# EAGLE board SC182029-V2R0-Encoder (EAGLE 9.4.0)
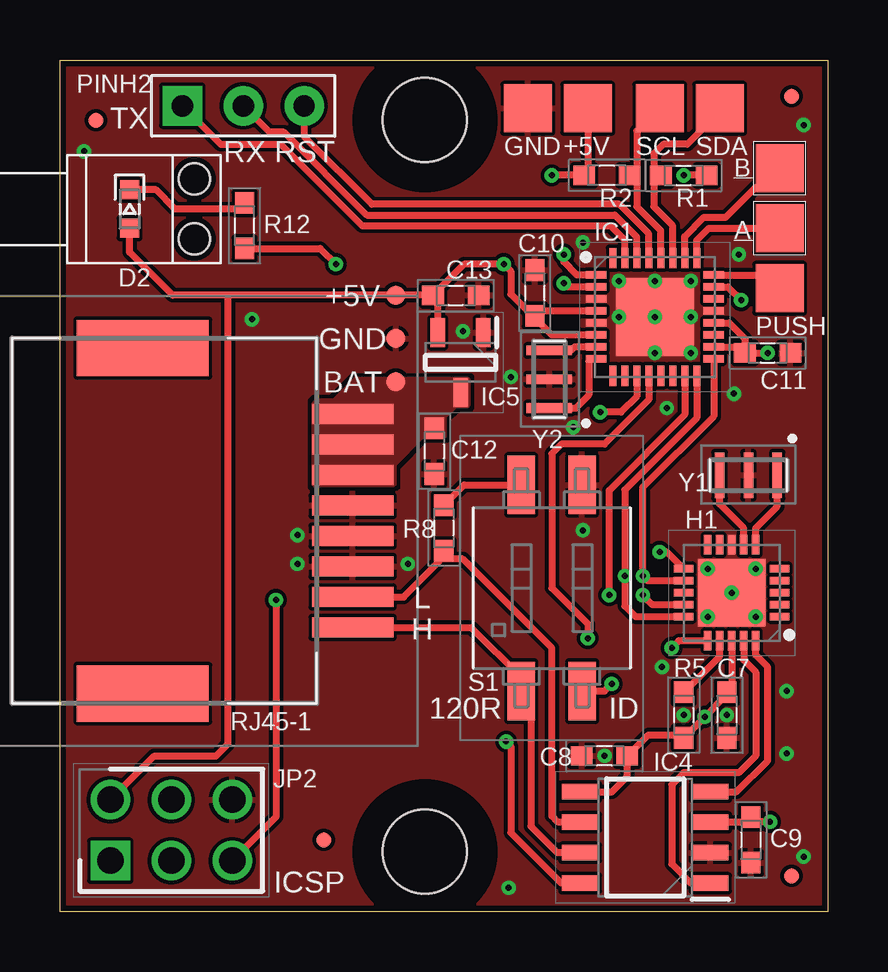
[diagram p0: board, top side]
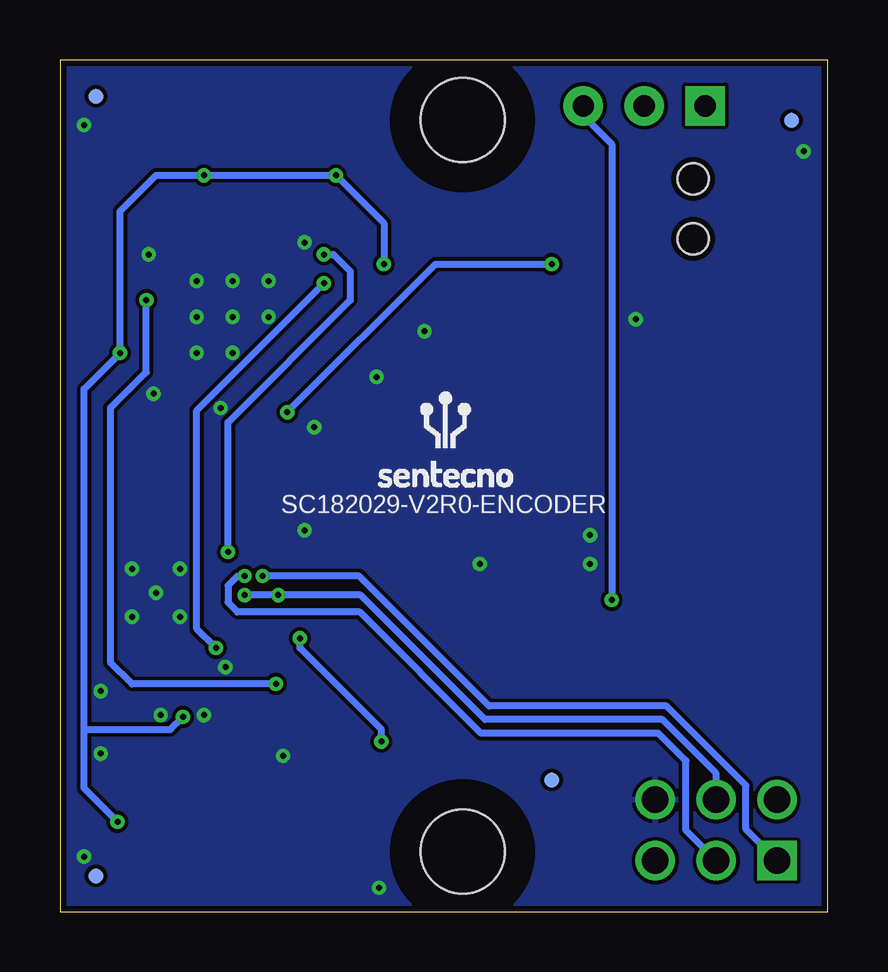
[diagram p1: board, bottom side, seen from below]

Size 32 x 35.51 mm. Coordinates in mm from the lower left corner, seen from the top.
Outline: 0,0 0,35.51 32,35.51 32,0 0,0
Copper layers (1*16): Top 0.018mm / dielectric 1.55mm / Bottom 0.018mm
Design rules "eC_2Layer_PClass6_BaseCopperO18_eCDefault_MOD_DRILL *": minimum track width 0.15mm, minimum drill 0.25mm, track to track 0.15mm, track to pad 0.15mm, pad to pad 0.15mm, via to via 0.15mm, smd to smd 0mil, copper to edge 0.25mm, drill to drill 0.25mm, minimum pad ring 0.175mm, minimum via ring 0.125mm, stop-mask expansion 0mil, vias tented up to drill 0.45mm, thermal gap 0.15mm
Holes 3.51 mm at 15.21,33.01 15.21,2.5
tRestrict: area 12.2,-0.5 to 18.2,5.5; area 12.2,30 to 18.2,36; area 20.9,24.4 to 21.7,24.7
bRestrict: area 12.2,30 to 18.2,36; area 12.2,-0.5 to 18.2,5.5

## Footprints (pad centres in the part's own frame; a part is rotated, then mirrored left to right if it is on the bottom)
TP20SQ = smd 2 x 2: TP 0,0
C0603R = smd 0.9 x 0.8: 1 -0.95,0; 2 0.95,0
WL-SMCW_0603 = smd 0.8 x 0.8: 1 -0.8,0; 2 0.8,0
MICRO-FIDUCIAL = smd 0.635 x 0.635: 1 0,0
QFN50P400X400X90-21N = smd 0.8 x 0.3: 1 -2,1; 2 -2,0.5; 3 -2,0; 4 -2,-0.5; 5 -2,-1; 11 2,-1; 12 2,-0.5; 13 2,0; 14 2,0.5; 15 2,1 | smd 0.3 x 0.8: 6 -1,-2; 7 -0.5,-2; 8 0,-2; 9 0.5,-2; 10 1,-2; 16 1,2; 17 0.5,2; 18 0,2; 19 -0.5,2; 20 -1,2 | smd 2.8 x 2.8: 21 0,0
QFN50P500X500X100-33N = smd 0.85 x 0.3: 1 -2.45,1.75; 2 -2.45,1.25; 3 -2.45,0.75; 4 -2.45,0.25; 5 -2.45,-0.25; 6 -2.45,-0.75; 7 -2.45,-1.25; 8 -2.45,-1.75; 17 2.45,-1.75; 18 2.45,-1.25; 19 2.45,-0.75; 20 2.45,-0.25; 21 2.45,0.25; 22 2.45,0.75; 23 2.45,1.25; 24 2.45,1.75 | smd 0.3 x 0.85: 9 -1.75,-2.45; 10 -1.25,-2.45; 11 -0.75,-2.45; 12 -0.25,-2.45; 13 0.25,-2.45; 14 0.75,-2.45; 15 1.25,-2.45; 16 1.75,-2.45; 25 1.75,2.45; 26 1.25,2.45; 27 0.75,2.45; 28 0.25,2.45; 29 -0.25,2.45; 30 -0.75,2.45; 31 -1.25,2.45; 32 -1.75,2.45 | smd 3.25 x 3.25: EP 0,0
SOIC127P600X175-8N = smd 1.525 x 0.65: 1 -2.712,1.905; 2 -2.712,0.635; 3 -2.712,-0.635; 4 -2.712,-1.905; 5 2.712,-1.905; 6 2.712,-0.635; 7 2.712,0.635; 8 2.712,1.905
SOT95P280X130-3N = smd 1.2 x 0.6: 1 -1.25,0.95; 2 -1.25,-0.95; 3 1.25,0
HDRV6W64P254_2X3_762X508X868P = drill 1.1 pad 1.65 square: 1 0,-1.27 | drill 1.1 pad 1.65: 2 0,1.27; 3 2.54,-1.27; 4 2.54,1.27; 5 5.08,-1.27; 6 5.08,1.27
LED_TUBE_2 = hole 1.3: -1.25,2.7; 1.25,2.7
PINH-1X03-2.54-1 = drill 0.889 pad 1.651 square: 1 2.54,0 | drill 0.889 pad 1.651: 2 0,0; 3 -2.54,0
R0603R = smd 0.9 x 0.8: 1 -0.95,0; 2 0.95,0
73304111LF = smd 3.4 x 0.84: 1 -7.1,4.445; 2 -7.1,3.175; 3 -7.1,1.905; 4 -7.1,0.635; 5 -7.1,-0.635; 6 -7.1,-1.905; 7 -7.1,-3.175; 8 -7.1,-4.445 | smd 5.5 x 2.35: MP1 1.65,-7.2; MP2 1.65,7.2
SMD-DIP-SWITCH-2P = smd 1.13 x 2.44: 1 -1.27,-4.3; 2 1.27,-4.3; A1 -1.27,4.3; A2 1.27,4.3
TP0.8MMR = smd 0.8 x 0.8: TP 0,0
CSTNE16M0V530000R0 = smd 0.4 x 1.9: 1 -1.2,0; 2 0,0; 3 1.2,0

## Placement (x,y rotation side)
+5V  TPTP20SQ  [TP20SQ]  22,33.5 0 top
A  TPTP20SQ  [TP20SQ]  30,28.5 0 top
B  TPTP20SQ  [TP20SQ]  30,31 0 top
C7  100nF  [C0603R]  27.8,8.2 270 top
C8  100nF  [C0603R]  22.7,6.5 180 top
C9  100nF  [C0603R]  28.8,3 270 top
C10  100nF  [C0603R]  19.8,25.8 90 top
C11  100nF  [C0603R]  29.5,23.3 0 top
C12  1uF  [C0603R]  15.6,19.2 270 top
C13  2.2uF  [C0603R]  16.5,25.7 0 top
D2  [WL-SMCW_0603]  2.9,29.3 270 top
FID1  FIDUCIALUFIDUCIAL  [MICRO-FIDUCIAL]  11,3 0 top
FID2  FIDUCIALUFIDUCIAL  [MICRO-FIDUCIAL]  1.5,33 0 top
FID3  FIDUCIALUFIDUCIAL  [MICRO-FIDUCIAL]  30.5,34 0 top
FID4  FIDUCIALUFIDUCIAL  [MICRO-FIDUCIAL]  30.5,1.5 0 top
FID5  FIDUCIALUFIDUCIAL  [MICRO-FIDUCIAL]  11.5,5.5 0 bottom
FID6  FIDUCIALUFIDUCIAL  [MICRO-FIDUCIAL]  30.5,1.5 0 bottom
FID7  FIDUCIALUFIDUCIAL  [MICRO-FIDUCIAL]  1.5,33 0 bottom
FID8  FIDUCIALUFIDUCIAL  [MICRO-FIDUCIAL]  30.5,34 0 bottom
GND  TPTP20SQ  [TP20SQ]  19.5,33.5 0 top
H1  MCP2515-I/ML  [QFN50P400X400X90-21N]  28,13.3 180 top
IC1  ATMEGA328P-MU  [QFN50P500X500X100-33N]  24.8,24.8 0 top
IC4  MCP2562T-H_SN  [SOIC127P600X175-8N]  24.4,3.1 180 top
IC5  AP2210N-SOT23-3  [SOT95P280X130-3N]  16.7,22.9 270 top
JP2  PINH-2X03-2.54-TH-M20  [HDRV6W64P254_2X3_762X508X868P]  2.1,3.4 0 top
LED_TUBE1  LED_TUBEH1  [LED_TUBE_2]  2.9,29.3 270 top
LOGO1  LOGO_SENTECNOLOGO_6X4MM  [LOGO_6X4MM]  16,19 0 bottom
PINH2  PINH-1X03-2.54  [PINH-1X03-2.54-1]  7.64,33.6 180 top
PUSH  TPTP20SQ  [TP20SQ]  30,26 0 top
R1  10K  [R0603R]  26,30.7 0 top
R2  10K  [R0603R]  22.8,30.7 180 top
R5  10K  [R0603R]  26,8.2 270 top
R8  120R  [R0603R]  16,16 270 top
R12  390R  [R0603R]  7.7,28.6 90 top
RJ45-1  RJ45-PLASTIC-SMD  [73304111LF]  5.1,16.3 180 top
S1  [SMD-DIP-SWITCH-2P]  20.5,13.5 0 top
SCL  TPTP20SQ  [TP20SQ]  25,33.5 0 top
SDA  TPTP20SQ  [TP20SQ]  27.5,33.5 0 top
TP1  TPTP08R  [TP0.8MMR]  14,22.1 0 top
TP2  TPTP08R  [TP0.8MMR]  14,25.7 0 top
TP3  TPTP08R  [TP0.8MMR]  14,23.9 0 top
Y1  16MHz  [CSTNE16M0V530000R0]  28.7,18.2 180 top
Y2  16MHz  [CSTNE16M0V530000R0]  20.4,22.2 90 top

## Library data of the parts
+5V A B FID1-FID8 GND LOGO1 PUSH SCL SDA TP1-TP3 = sentecno_misc
C7-C11 = sentecno_pasivos; MAN1: AVX; MAN1PN: 0603YC104KAT2A; SENTPN: CCSMD-0603-104-6V3; VALUE2: 6V3
C12 = sentecno_pasivos; MAN1: Taiyo Yuden; MAN1PN: LMK107B7105KA-T; SENTPN: CCSMD-0603R-105-16V; VALUE2: 16V
C13 = sentecno_pasivos; MAN1: Taiyo Yuden; MAN1PN: EMK107BJ225MA-T; SENTPN: CCSMD-0603R-225-10V; VALUE2: 10V
D2 = sentecno_optoelectronica; MAN1: Inolux; MAN1PN: IN-S63AT5G; SENTPN: LEDSMD-0603-GREEN
H1 = sentecno_integrados; MAN1: Microchip; MAN1PN: MCP2515-I/ML; NOTES: H0.9mm; SENTPN: MCP2515-I/ML
IC1 = sentecno_integrados; MAN1: Microchip Technology / Atmel; MAN1PN: ATMEGA328P-MU; SENTPN: ATMEGA328P-MU
IC4 = sentecno_integrados; MAN1: Microchip; MAN1PN: MCP2562T-H/SN; NOTES: H1.75mm; SENTPN: MCP2562T-H/SN
IC5 = sentecno_alimentacion; MAN1: Diodes Inc.; MAN1PN: AP2210N-5.0TRG1; NOTES: H1.3mm; SENTPN: AP2210N-5.0TRG1
JP2 = sentecno_conectores; MAN1: Harwin; MAN1PN: M20-9980346; SENTPN: PINH-2X03-2.54
LED_TUBE1 = sentecno_optoelectronica; MAN1: Bivar; MAN1PN: SLP3-150-150-F; SENTPN: SLP3-150-150-F
PINH2 = sentecno_conectores; BLOCK: NM; SENTPN: PINH-M-1x03-2.54
R1 R2 = sentecno_pasivos; MAN1: Yageo; MAN1PN: RC0603JR-074K7L; SENTPN: RSMD-0603-4K7
R5 = sentecno_pasivos; MAN1: Bourns; MAN1PN: CR0603-JW-103ELF; SENTPN: RSMD-0603-10K
R8 = sentecno_pasivos; MAN1: Yageo; MAN1PN: RC0603FR-07120RL; SENTPN: RSMD-0603R-120R-10; VALUE2: 1%
R12 = sentecno_pasivos; MAN1: Yageo; MAN1PN: RC0603FR-07390RL; SENTPN: RSMD-0603-390R
RJ45-1 = sentecno_conectores; MAN1: Amphenol FCI; MAN1PN: 73304-111LF; NOTES: H14mm; SENTPN: CONSTD-RJ45-SMD-90
S1 = sentecno_electromecanicos; MAN1: CTS Electronic Components; MAN1PN: 219-2MST; SENTPN: SWSMD-1x02
Y1 Y2 = sentecno_pasivos; MAN1: Murata Electronics; MAN1PN: CSTNE16M0V530000R0; NOTES: H0.9mm; SENTPN: CRES-3.2x1.3-16MHz

## Nets
+5V: +5V.TP C7.1 C8.1 C9.1 C10.1 C11.1 C13.1 D2.2 H1.18 IC1.4 IC1.6 IC1.18 IC1.20 IC4.3 IC4.5 IC5.2 JP2.2 R1.2 R2.2 R5.2 TP2.TP
/CS: H1.16 IC1.2
/INT: H1.11 IC1.1
/RST: H1.17 R5.1
A: A.TP IC1.25
B: B.TP IC1.26
BAT: C12.1 IC5.3 RJ45-1.6 RJ45-1.7 RJ45-1.8 TP1.TP
CANH: IC4.7 RJ45-1.1 S1.1
CANL: IC4.6 R8.2 RJ45-1.2
GND: C7.2 C8.2 C9.2 C10.2 C11.2 C12.2 C13.2 GND.TP H1.8 H1.21 IC1.3 IC1.5 IC1.21 IC1.EP IC4.2 IC5.1 JP2.6 RJ45-1.3 RJ45-1.4 RJ45-1.5 S1.A2 TP3.TP Y1.2 Y2.2
ID_CHG: IC1.23 S1.2
LED: IC1.11 R12.1
MISO: H1.15 IC1.16 JP2.1
MOSI: H1.14 IC1.15 JP2.4
N$2: R8.1 S1.A1
N$7: D2.1 R12.2
OSC1: H1.7 Y1.3
OSC2: H1.6 Y1.1
PUSH: IC1.24 PUSH.TP
RST: IC1.29 JP2.5 PINH2.3
RXCAN: H1.20 IC4.4
RXD: IC1.30 PINH2.2
SCK: H1.12 IC1.17 JP2.3
SCL: IC1.28 R2.1 SCL.TP
SDA: IC1.27 R1.1 SDA.TP
STBY: IC1.12 IC4.8
TXCAN: H1.19 IC4.1
TXD: IC1.31 PINH2.1
XTAL1: IC1.7 Y2.3
XTAL2: IC1.8 Y2.1

## Tracks (layer width: path | path; a pad name or v marks a point on that pad's centre or on a via)
+5V  (via drill 0.25 pad 0.6)
  Top 0.3: H1.18 28,9.35 27.82,9.18 | 27.82,9.18 C7.1 | R5.2 26.12,7.38 | 26.12,7.38 v26.88,8.13 27.82,9.08 27.82,9.18 | IC4.5 23,5 23.65,5.65 C8.1 24.52,7.38 26.12,7.38 | IC4.3 28.59,3.74 C9.1 29,3.75 v29.6,3.75 | +5V.TP 22,30.85 R2.2 v20.5,30.7 | IC1.18 28.46,23.55 C11.1 | IC1.4 20,25.05 C10.1 19.7,24.85 | IC1.20 27.9,24.55 28.55,23.9 C11.1 | 7,25.7 TP2.TP C13.1 15.68,25.83 | 7,25.7 4.7,25.7 2.9,27.5 D2.2 | 15.68,25.83 16.85,27 v18.5,27 18.8,26.7 18.8,25.75 19.7,24.85 | R1.2 v26,30.7 | IC5.2 15.75,25.75 15.68,25.83 | C11.1 v29.5,23.3 | IC1.6 20.5,24.05 19.7,24.85 | JP2.2 3.93,6.5 6.5,6.5 7,7 7,25.7
  Bottom 0.3: v18.5,27 18.5,28.7 v20.5,30.7 v26,30.7 28,30.7 29.5,29.2 v29.5,23.3 31,21.8 31,7.6 | v29.6,3.75 31,5.15 31,7.6 | 31,7.6 27.4,7.6 v26.88,8.13
/CS  (via drill 0.25 pad 0.6)
  Top 0.3: IC1.2 21.15,26.05 v21,26.2 | v25.5,11 25.8,11.3 H1.16
  Bottom 0.3: v25.5,11 26.3,11.8 26.3,20.9 v21,26.2
/INT  (via drill 0.25 pad 0.6)
  Top 0.3: H1.11 25.3,15 v25,15 | IC1.1 21.55,26.55 21,27.1 v21,27.4
  Bottom 0.3: v25,15 25,20.4 19.9,25.5 19.9,26.7 20.6,27.4 v21,27.4
/RST
  Top 0.3: R5.1 27.5,10.65 H1.17
A
  Top 0.3: IC1.25 26.55,28 27.05,28.5 A.TP
B
  Top 0.3: IC1.26 26.05,28.15 26.85,28.95 27.75,28.95 29,30.2 29.2,30.2 B.TP
BAT
  pour Top (no thermals): 10.5,21.2 10.7,21.4 11.4,21.4 12.3,22.3 17,22.3 17.1,22.2 17.1,21.1 17,21 16.5,21 16.1,20.6 16.1,19.8 16,19.7 15.1,19.7 14,18.6 14,17.8 13.9,17.7 10.6,17.7 10.5,17.8
CANH
  Top 0.3: IC4.7 20.73,2.47 19.63,3.57 19.63,8.6 19.23,9 S1.1 19.23,9.77 17.14,11.86 RJ45-1.1
CANL
  Top 0.3: RJ45-1.2 14.32,13.13 15.8,14.6 15.8,14.7 | 15.8,14.7 15.8,15 16,15 R8.2 | IC4.6 20.77,3.74 20.5,4 20.5,11 16.8,14.7 15.8,14.7
GND  (via drill 0.25 pad 0.6)
  other vias: 14.5,14.5 9.9,14.5 9.9,15.7 8,24.7 1,31.7 31,2.3 31,32.8 21.8,27.9 28.3,27.4 28.1,21.6 25.3,21 24.8,24.8 24.8,26.3 26.3,26.3 26.3,24.8 26.3,23.3 24.8,23.3 23.3,24.8 23.3,26.3 16.8,24.2 18.8,22.3 21.4,20.2 28,13.3 27,14.3 29,14.3 29,12.3 27,12.3 30.3,9.2 25.1,10.2 21.8,15.9 26,8.2 30.3,6.6 22.7,6.5 18.7,1 27.8,8.2
  pour Top (rank 2): 0,35.5 32,35.5 32,0 0,0
  pour Bottom (rank 2): 0,35.5 32,35.5 32,0 0,0
  pour Top (no thermals): 21.7,27.9 27.9,27.9 27.9,21.7 21.7,21.7
  pour Top (rank 2, no thermals): 25.4,15.9 30.6,15.9 30.6,10.7 25.4,10.7
ID_CHG  (via drill 0.25 pad 0.6)
  Top 0.3: IC1.23 27.85,26.05 v28.4,25.5 | S1.2 22.7,9.2 v23,9.5
  Bottom 0.3: v23,9.5 29,9.5 29.9,10.4 29.9,21 28.4,22.5 v28.4,25.5
LED  (via drill 0.25 pad 0.6)
  Top 0.3: IC1.11 24.05,21.49 23.39,20.83 v22.53,20.83 | R12.1 10.85,27.65 v11.5,27
  Bottom 0.3: v22.53,20.83 16.35,27 v11.5,27
MISO  (via drill 0.25 pad 0.6)
  Top 0.3: IC1.16 26.55,20.59 23.55,17.59 v23.55,14 23.55,12.75 24,12.3 H1.15
  Bottom 0.3: JP2.1 3.4,3.43 3.4,5.27 6.72,8.58 14.11,8.58 19.53,14 v23.55,14
MOSI  (via drill 0.25 pad 0.6)
  Top 0.3: IC1.15 26.05,20.72 22.9,17.57 v22.9,13.2 | v24.3,13.2 24.7,12.8 H1.14
  Bottom 0.3: JP2.4 4.64,5.77 6.88,8.02 14.28,8.02 19.46,13.2 v22.9,13.2 v24.3,13.2
N$2
  Top 0.3: R8.1 16.85,17.8 S1.A1
N$7
  Top 0.3: D2.1 4,30.1 4.8,29.3 7.45,29.3 R12.2
OSC1
  Top 0.3: H1.7 28.5,16 27.5,17 Y1.3
OSC2
  Top 0.3: H1.6 29,16 29.9,16.9 Y1.1
PUSH
  Top 0.3: IC1.24 29.45,26.55 PUSH.TP
RST  (via drill 0.25 pad 0.6)
  Top 0.3: IC1.29 24.55,28.26 23.31,29.5 13,29.5 10.18,32.32 PINH2.3 | v9,13 9,3.95 JP2.5
  Bottom 0.3: PINH2.3 10.18,33.18 9,32 v9,13
RXCAN
  Top 0.3: IC4.4 28.2,5.01 29.5,6.3 29.5,10.2 29,10.7 H1.20
RXD
  Top 0.3: IC1.30 24.05,28.13 23.13,29.05 12.79,29.05 9.34,32.5 8.74,32.5 PINH2.2
SCK  (via drill 0.25 pad 0.6)
  Top 0.3: IC1.17 27.25,20.65 24.3,17.7 v24.3,14 24.5,13.8 H1.12
  Bottom 0.3: JP2.3 5.9,3.39 5.9,6.29 7.05,7.45 14.45,7.45 19.5,12.5 24.6,12.5 25,12.9 25,13.6 24.6,14 v24.3,14
SCL
  Top 0.3: IC1.28 25.05,28.4 24.05,29.4 24.05,30.4 R2.1 24.05,31 24.05,32.55 SCL.TP
SDA
  Top 0.3: IC1.27 25.55,28.6 24.75,29.4 24.75,30.4 R1.1 24.75,31 24.75,31.6 25.15,32 26.15,32 27.5,33.35 SDA.TP
STBY  (via drill 0.25 pad 0.6)
  Top 0.3: IC4.8 20.91,1.2 18.8,3.3 18.8,6.9 v18.6,7.1 | v22,11.4 22,12 20.5,13.5 20.5,19.1 20.9,19.5 22.7,19.5 24.55,21.35 IC1.12
  Bottom 0.3: v18.6,7.1 18.6,7.6 22,11 v22,11.4
TXCAN
  Top 0.3: H1.19 28.5,10.5 29,10 29,6.5 28.3,5.8 26,5.8 25.5,5.3 25.5,2 26.3,1.2 IC4.1
TXD
  Top 0.3: IC1.31 23.55,27.99 22.94,28.6 12.6,28.6 9.2,32 6.7,32 PINH2.1
XTAL1
  Top 0.3: Y2.3 21.3,23.4 21.45,23.55 IC1.7
XTAL2
  Top 0.3: Y2.1 21.5,21 22.05,21.55 22.05,22.95 22.15,23.05 IC1.8

## Text on the board
tPlace: TX | RX | RST | +5V | GND | BAT | L | H | 120R | ID | ICSP
bPlace: SC182029-V2R0-ENCODER
Document: http://www.hammondmfg.com/dwg2XX.htm / / https://www.robotshop.com/uk/30mm-aluminium-wheel.html